# Altium PCB FC_Tracker_Ver_0_0.PcbDoc
Units mm, origin at the board's own origin, x right, y up, seen from the top; angles counter-clockwise.
Board outline 58 x 52 mm, 2 copper layers (Top Layer, Bottom Layer); 35 components, 24 nets, 153 pads, 30 vias.
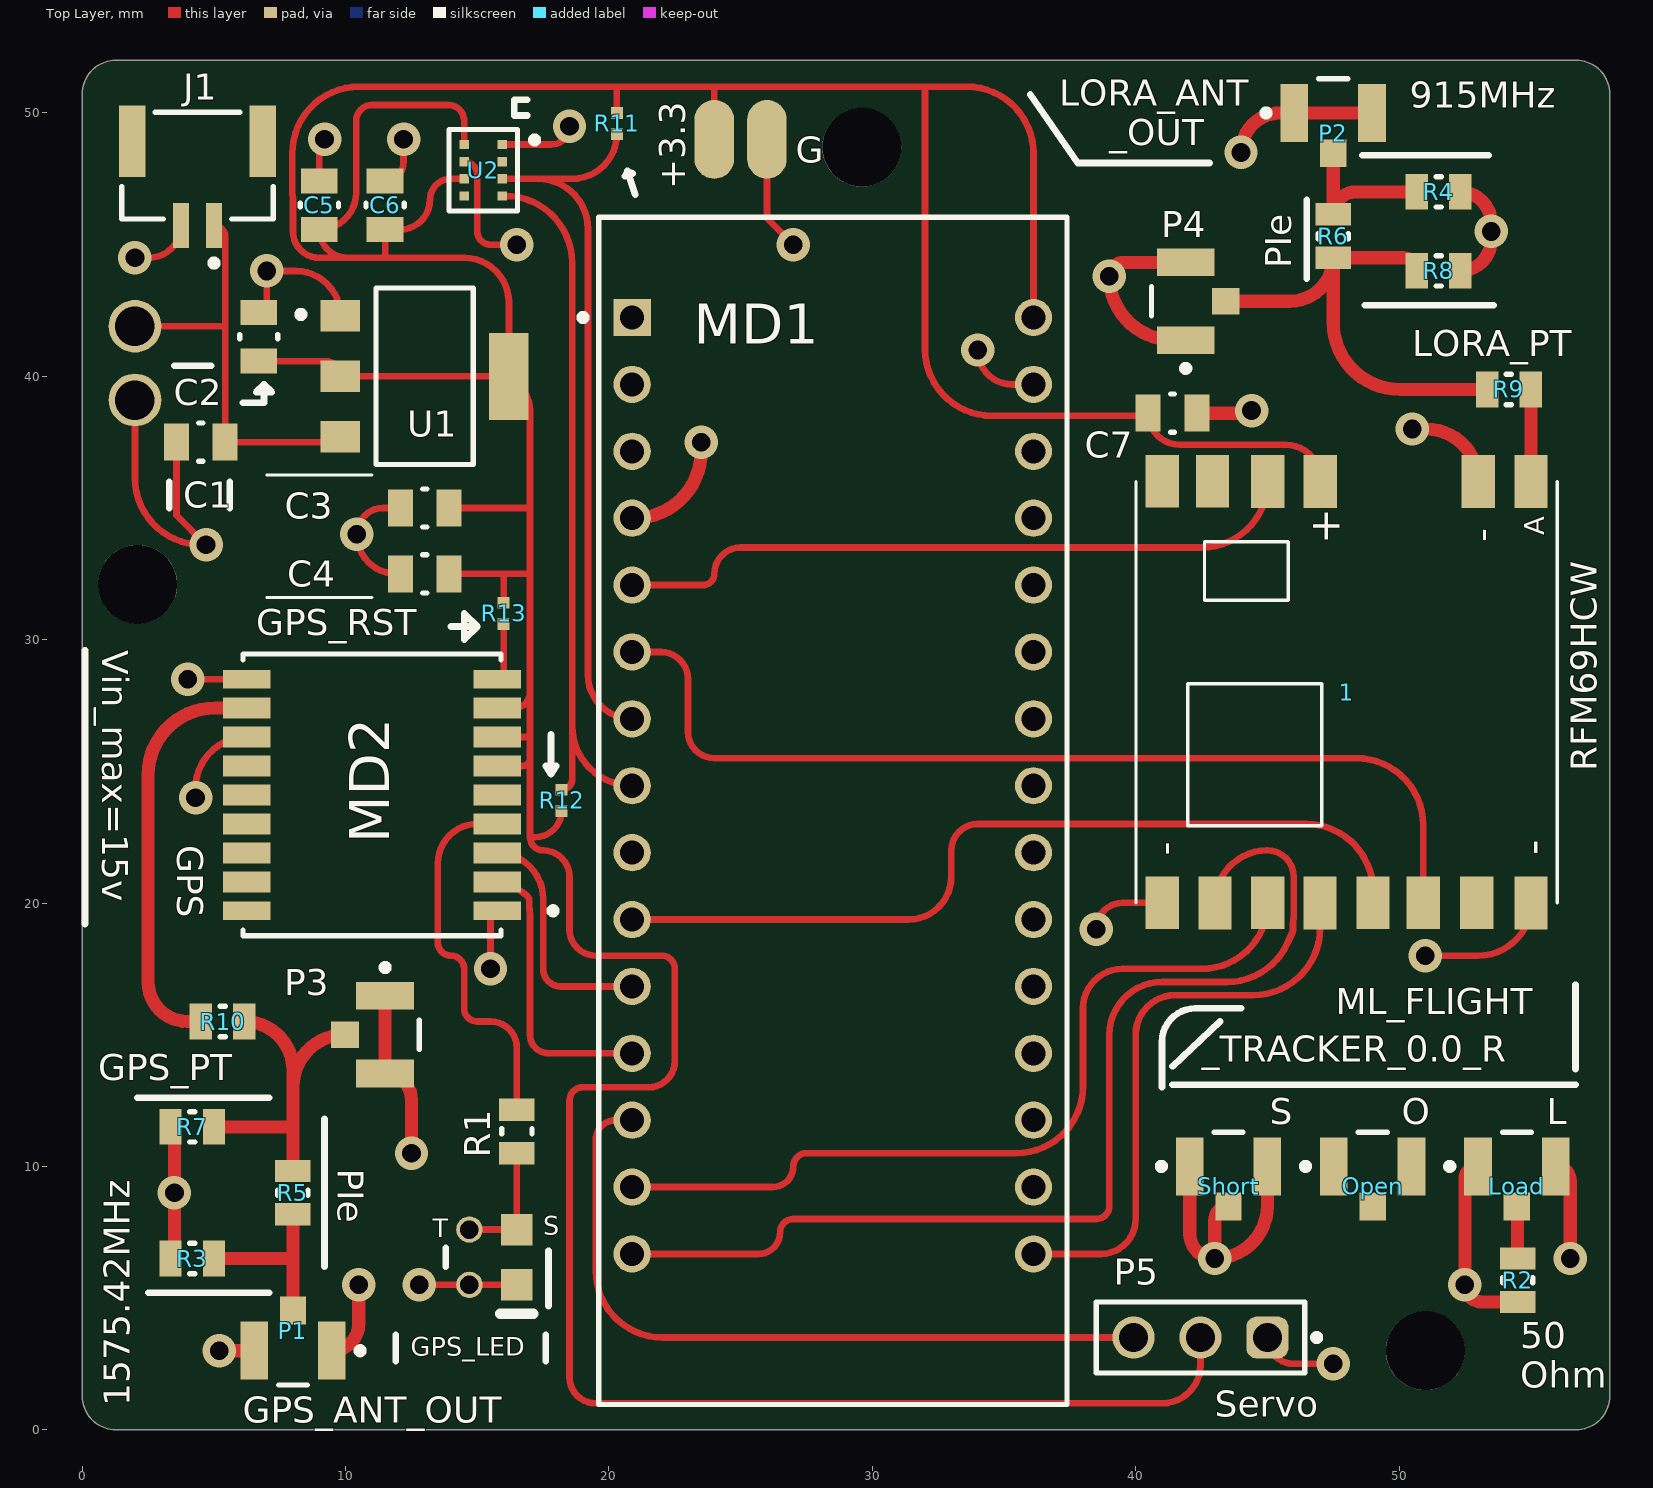
[diagram p0: Top Layer view]
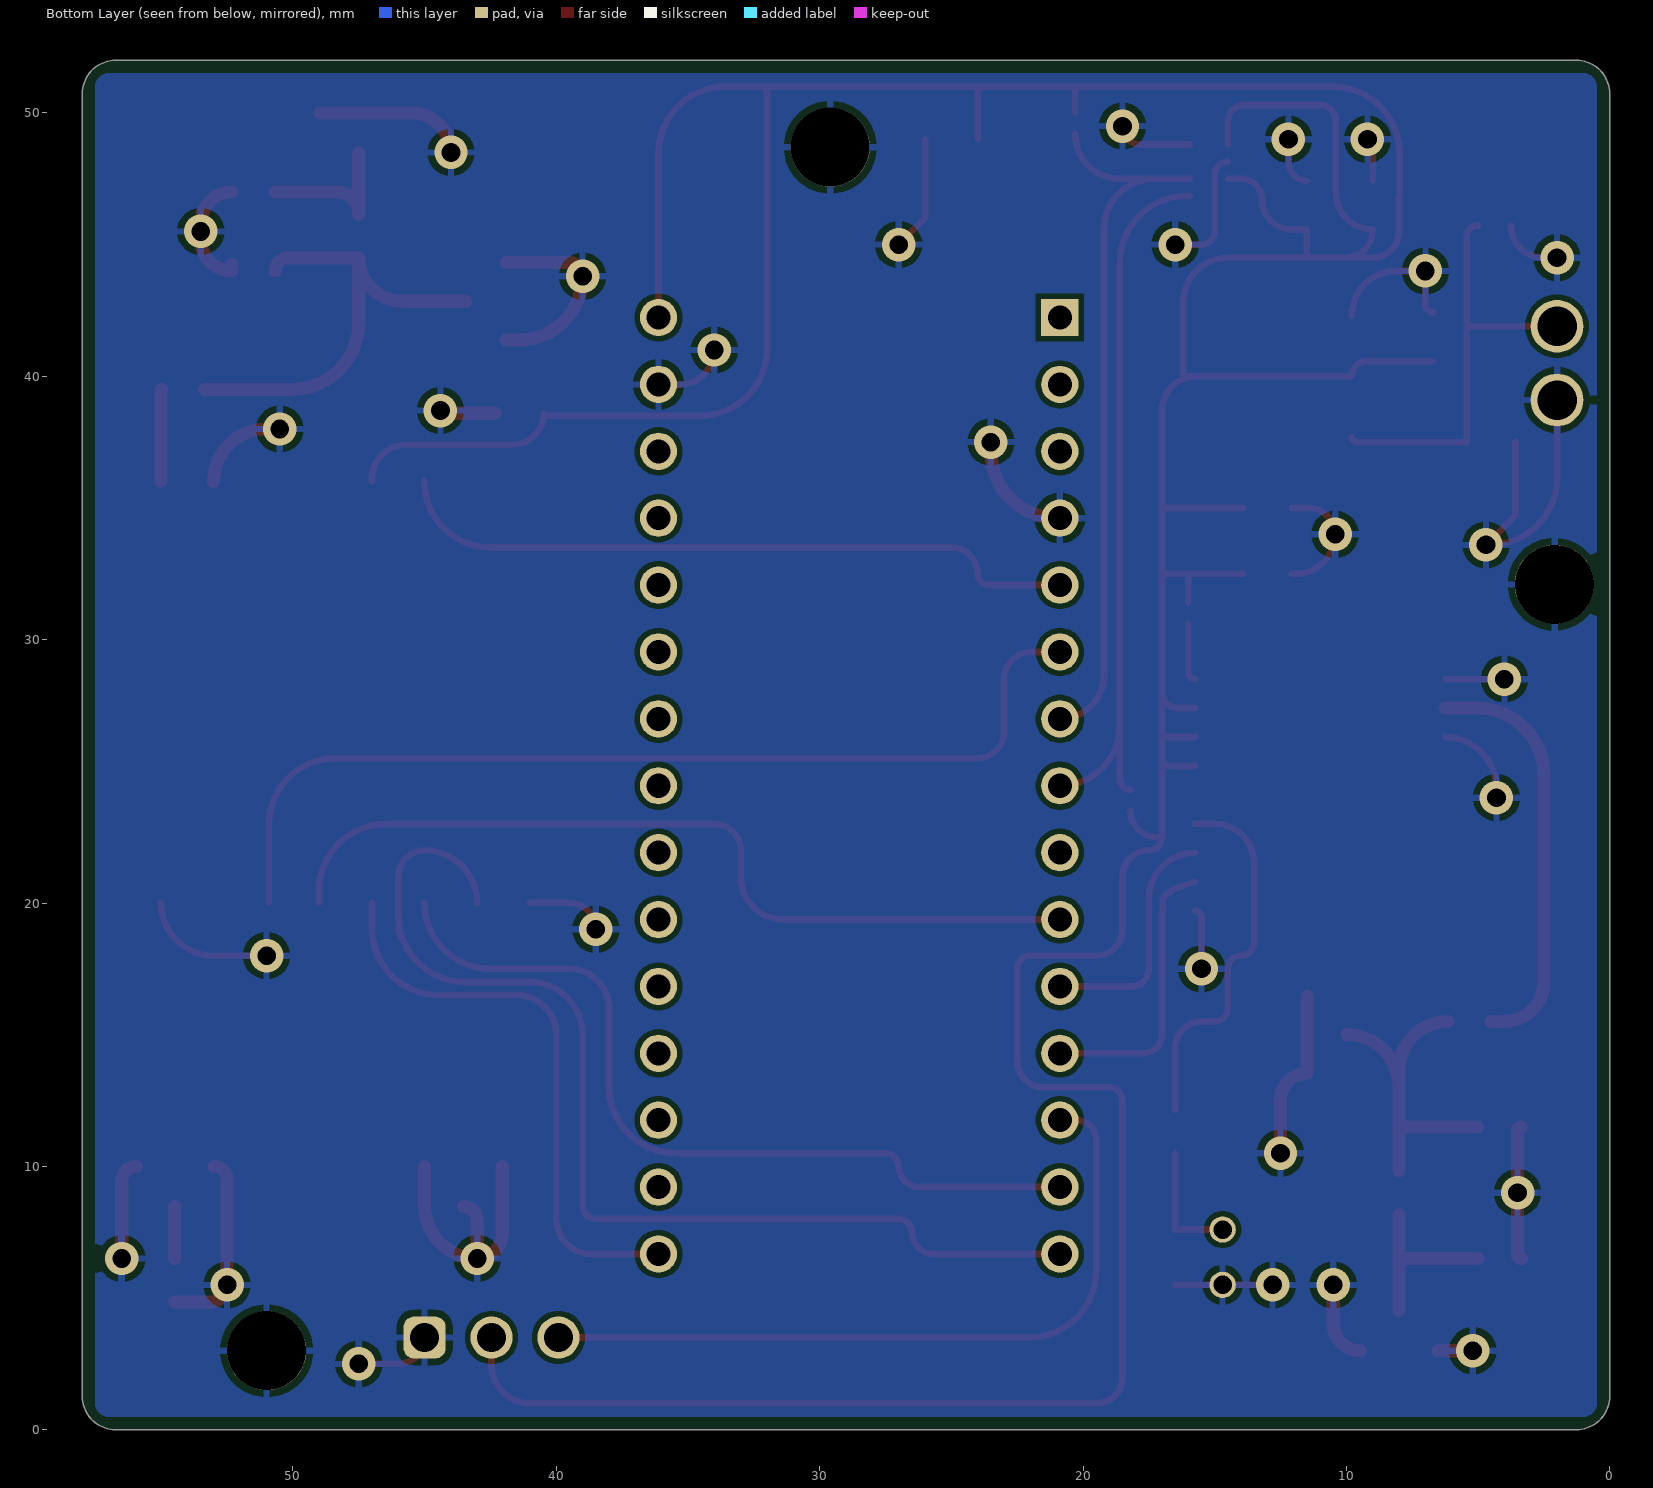
[diagram p1: Bottom Layer view, seen from below]

## Layer stack, top to bottom
Top Solder: solder mask 0.0102, Solder Resist, Dk 3.5
Top Layer: signal copper 0.0356
Dielectric 1: dielectric 0.32, FR-4, Dk 4.8
Bottom Layer: signal copper 0.0356
Bottom Solder: solder mask 0.0102, Solder Resist, Dk 3.5

## Board outline
0,1.27 0,50.73 cw(c1.27,50.73) 1.27,52 56.73,52 cw(c56.73,50.73) 58,50.73 58,1.27 cw(c56.73,1.27) 56.73,0 1.27,0 cw(c1.27,1.27)

## Design rules (kind name [scope] priority, off if disabled: settings)
Clearance [All] p1: gap=0.2 ignorepadtopadclearanceinfootprint=TRUE except(0.254: Arc-Hole Track-Hole SMDPad-Hole THPad-Hole Via-Hole Fill-Hole Poly-Hole Region-Hole Text-Hole)
ComponentClearance [All] p1: gap=0.2 collisioncheckmode=3 verticalgap=0.254 showdistances=FALSE
HoleSize [All] p1: absolutevalues=TRUE maxlimit=3.1 minlimit=0.025 maxpercent=80.000 minpercent=20.000
MinimumSolderMaskSliver [All] p1: minsoldermaskwidth=0.19
PolygonConnect [All] p1: connectstyle=Relief reliefconductorwidth=0.254 reliefentries=4 polygonreliefangle="90 Angle" airgapwidth=0.254
RoutingVias [All] p1: holewidth=0.711 width=1.27 viastyle="Through Hole" minholewidth=0.711 minwidth=1.27 maxholewidth=0.711 maxwidth=1.27
SilkToSolderMaskClearance [IsPad] p1: minsilkscreentomaskgap=0.1 clearancetoexposedcopper=TRUE
SolderMaskExpansion [All] p1: expansion=0.102 istentingtop=FALSE
SupplyNets "Schematic Supply Nets_3" [InNet('+12')] p1: voltage=0.000
SupplyNets "Schematic Supply Nets_2" [InNet('+3.3v')] p2: voltage=0.000
SupplyNets "Schematic Supply Nets_1" [InNet('GND')] p3: voltage=0.000
Width [All] p1: maxlimit=0.5 minlimit=0.254 preferedwidth=0.254
26 further rules are at their usual default settings.

## Components (designator, comment, footprint, x,y, rotation, side; value= is the part's Value field where it differs from the comment)
1 "_C2H_RFM95" _C2H_RFM95 48.012,30.23 r90 top
C1 "100 nF" FP-CC0805-0_85-MFG 4.5,37.5 r180 top
C2 "10 uF" FP-CC0805-0_85-MFG 6.7,41.5 r90 top value="100 nF"
C3 "0.1uF" FP-CC0805-0_85-MFG 13,35 r180 top value="100 nF"
C4 "0.1uF" FP-CC0805-0_85-MFG 13,32.5 r180 top value="100 nF"
C5 "100 nF" FP-CC0805-0_85-MFG 9,46.5 r90 top
C6 "100 nF" FP-CC0805-0_85-MFG 11.5,46.5 r90 top
C7 "100nF" FP-CC0805-0_85-MFG 41.4,38.6 r0 top value="100 nF"
GPS_LED "HSMG-C170" AVAG-HSMX-C170_V 16.5,6.55 r270 top (schematic designator DS1)
J1 "SM02B-GHS-TB(LF)(SN)" FP-SM02B-GHS-TB_LF_SN-MFG 4.374,48 r180 top
Load "U.FL-R-SMT-1(01)" HRS-U.FL-R-SMT-3_V 54.475,10 r0 top
MD1 "A000005" FP-A000005-MFG 28.5,23.5 r0 top
MD2 "MAX-M10S-00B" FP-MAX-M10S-00B-MFG 11,24.104 r180 top
Open "U.FL-R-SMT-1(01)" HRS-U.FL-R-SMT-3_V 49,10 r0 top
P1 "U.FL-R-SMT-1(01)" HRS-U.FL-R-SMT-3_V 8,3 r180 top
P2 "U.FL-R-SMT-1(01)" HRS-U.FL-R-SMT-3_V 47.5,50 r0 top
P3 "U.FL-R-SMT-1(01)" HRS-U.FL-R-SMT-3_V 11.5,15 r270 top
P4 "U.FL-R-SMT-1(01)" HRS-U.FL-R-SMT-3_V 41.9,42.85 r90 top
P5 "61300311121" 61300311121 42.46,3.5 r180 top
R1 "CRCW08050000Z0EA" RESC2013X50X30LL20T20 16.5,11.325 r270 top
R2 "CRCW08050000Z0EA" RESC2013X50X30LL20T20 54.5,5.675 r90 top
R3 "CRCW08050000Z0EA" RESC2013X50X30LL20T20 4.175,6.5 r0 top
R4 "CRCW08050000Z0EA" RESC2013X50X30LL20T20 51.5,47 r0 top
R5 "CRCW08050000Z0EA" RESC2013X50X30LL20T20 8,9 r270 top
R6 "CRCW08050000Z0EA" RESC2013X50X30LL20T20 47.5,45.325 r90 top
R7 "CRCW08050000Z0EA" RESC2013X50X30LL20T20 4.175,11.5 r180 top
R8 "CRCW08050000Z0EA" RESC2013X50X30LL20T20 51.5,44 r0 top
R9 "CRCW08050000Z0EA" RESC2013X50X30LL20T20 54.175,39.5 r180 top
R10 "CRCW08050000Z0EA" RESC2013X50X30LL20T20 5.325,15.5 r0 top
R11 "5K" RESC1005X40X25LL05T05 20.3,49.6 r90 top
R12 "5K" RESC1005X40X25LL05T05 18.2,23.9 r90 top
R13 "ERJ2GE0R00X" RESC1005X40X25LL05T05 16,31 r90 top
Short "U.FL-R-SMT-1(01)" HRS-U.FL-R-SMT-3_V 43.525,10 r0 top
U1 "LD1117S33CTR" FP-SOT-223-0046067_14-MFG 13,40 r0 top
U2 "DPS368XTSA1" FP-PG-VLGA-8-MFG 15.225,47.825 r0 top

## Footprints (in the part's own frame and the unit in brackets; to place one, negate y for a bottom-side part, rotate by r counter-clockwise, add the part's x,y. Pads: shape width x height; smd on the part's side, far side on the other; paste and mask are expansions set on the pad)
61300311121 [mm] "Pin Header, pitch 2.54 mm, THT, Vertical, single row, 3p"
  rrect50% 1.6x1.6 hole 1.1: 1(-2.54,0)
  round 1.6 hole 1.1: 2(0,0) 3(2.54,0)
  silkscreen extent -4.53,-1.35 3.96,1.35, body extent -3.81,-1.27 3.81,1.27, height 8.57
_C2H_RFM95 [mm]
  rect 2x1.27 smd: ANT(5.777,-7) DIO0(5.777,3) DIO1(5.78,5.095) DIO2(5.78,7) DIO5(-10.225,-4.936) GND(5.777,-5) GND1(-10.222,7) GND2(-10.23,-7) MISO(-10.23,5) MOSI(-10.225,3) NSS(-10.222,-1) RST(-10.222,-2.905) SCK(-10.23,1.012) VDD(5.777,1)
  silkscreen extent -10.23,-8 5.78,8
AVAG-HSMX-C170_V [mm] "SMD, 2-Leads, Body 2x1.25mm, Height 0.8mm"
  rect 1.2x1.2 smd: 1(-1.05,0) 2(1.05,0)
  silkscreen extent 2.15,-0.63 2.15,0.63, body extent -1,-0.63 1,0.63, height 0.8
FP-A000005-MFG [mil]
  rect 55.67x55.67 hole 35.98 paste-99999 mask+0: 1(-300,737.5)
  round 55.67 hole 35.98 paste-99999 mask+0: 2(-300,637.5) 3(-300,537.5) 4(-300,437.5) 5(-300,337.5) 6(-300,237.5) 7(-300,137.5) 8(-300,37.5) 9(-300,-62.5) 10(-300,-162.5) 11(-300,-262.5) 12(-300,-362.5) 13(-300,-462.5) 14(-300,-562.5) 15(-300,-662.5) 16(300,-662.5) 17(300,-562.5) 18(300,-462.5) 19(300,-362.5) 20(300,-262.5) 21(300,-162.5) 22(300,-62.5) 23(300,37.5) 24(300,137.5) 25(300,237.5) 26(300,337.5) 27(300,437.5) 28(300,537.5) 29(300,637.5) 30(300,737.5)
  silkscreen extent -379,-888 350,888, body extent -354,-891 354,891, height 10
FP-CC0805-0_85-MFG [mm]
  rect 0.95x1.4 smd paste+0 mask+0: 1(-0.925,0) 2(0.925,0)
  silkscreen extent -0.08,-0.72 0.08,0.72, body extent -1.6,-1.05 1.6,1.05, height 0.25
FP-MAX-M10S-00B-MFG [mm]
  rect 1.8x0.7 smd paste-1000 mask+0: 1(-4.75,4.4) 9(-4.75,-4.4) 10(4.75,-4.4) 18(4.75,4.4)
  rect 1.8x0.8 smd paste-1000 mask+0: 2(-4.75,3.3) 3(-4.75,2.2) 4(-4.75,1.1) 5(-4.75,0) 6(-4.75,-1.1) 7(-4.75,-2.2) 8(-4.75,-3.3) 11(4.75,-3.3) 12(4.75,-2.2) 13(4.75,-1.1) 14(4.75,0) 15(4.75,1.1) 16(4.75,2.2) 17(4.75,3.3)
  silkscreen extent -7,-5.35 4.9,5.35, body extent -5.75,-5.45 5.75,5.45, height 0.25
FP-PG-VLGA-8-MFG [mm]
  rect 0.35x0.35 smd paste-1000 mask+0: 1(0.725,0.975) 2(0.725,0.325) 3(0.725,-0.325) 4(0.725,-0.975) 5(-0.725,-0.975) 6(-0.725,-0.325) 7(-0.725,0.325) 8(-0.725,0.975)
  silkscreen extent -1.3,-1.55 2.08,1.55, body extent -1.55,-1.8 1.55,1.8, height 0.25
FP-SM02B-GHS-TB_LF_SN-MFG [mm]
  rect 0.6x1.7 smd paste+0 mask+0: 1(-0.625,2.275) 2(0.625,2.275)
  rect 1x2.7 smd paste+0 mask+0: 3(-2.475,-0.925) 4(2.475,-0.925)
  silkscreen extent -2.88,-2.02 2.88,3.82, body extent -3.08,-2.37 3.08,3.22, height 0.25
FP-SOT-223-0046067_14-MFG [mm]
  rect 1.5x1.2 smd paste+0 mask+0: 1(-3.2,2.3) 2(-3.2,0) 3(-3.2,-2.3)
  rect 1.5x3.3 smd paste+0 mask+0: 4(3.2,0)
  silkscreen extent -4.82,-3.35 1.85,3.35, body extent -4.05,-3.45 4.05,3.45, height 0.25
HRS-U.FL-R-SMT-3_V [mm] "SMT, 3-Leads, Body 2.6x2.6mm"
  rect 1.05x2.2 smd: 1(-1.475,0) 2(1.475,0)
  rect 1x1.05 smd: 3(0,-1.525)
  silkscreen extent -2.67,-0.12 0.55,1.3, body extent -1.3,-1.3 1.3,1.3, height 1.25
RESC1005X40X25LL05T05 [mm] "Chip Resistor, 2-Leads, Body 1.05x0.55mm, IPC High Density"
  rect 0.45x0.45 smd: 1(-0.4,0) 2(0.4,0)
  body extent -0.53,-0.28 0.53,0.28, height 0.4
RESC2013X50X30LL20T20 [mm] "Chip Resistor, 2-Leads, Body 2.00x1.25mm, IPC High Density"
  rect 0.85x1.35 smd: 1(-0.825,0) 2(0.825,0)
  silkscreen extent -0.1,-0.58 0.1,0.58, body extent -1.1,-0.72 1.1,0.72, height 0.5

## Part data
C1 C5 C6: library part CMP-2100-03606-3, Manufacturer=Yageo, Manufacturer Part Number=CC0805KRX7R9BB104, Package=CC0805-0.85, Temperature="-30°C to +85°C", Temperature Characteristic=X7R, Temperature Range High=+85°C, Temperature Range Low=-30°C, Tolerance=0.1, Voltage Rating="50 V", Automotive=No, Capacitance="100 nF", Category=Cap, ComponentLink2Description=Datasheet, ComponentLink2URL=http://www.yageo.com/documents/recent/UPY-GPHC_Y5V_6.3V-to-50V_8.pdf, Device Class L1="Passive Components", Device Class L2=Capacitors, Device Class L3="Ceramic Capacitors", Digikey Description="CAP CER 0.1UF 50V X7R 0805", Footprint Url=http://www.yageo.com/exep/pages/download/literatures/UPY-C_GEN_24.pdf, Height=0.95mm, Ipc Land Pattern Name=CAPC200125X85, Lead Free=Yes, Material=Ceramic, Mouser Description="Multilayer Ceramic Capacitors MLCC - SMD/SMT 100nF 50V X7R 10%", Octopart=https://octopart.com/cc0805krx7r9bb104-yageo-192993, RoHS=TRUE
C2: library part CMP-2100-03606-3, Capacitance="100 nF", Manufacturer=Yageo, Manufacturer Part Number=CC0805KRX7R9BB104, Package=CC0805-0.85, Temperature="-30°C to +85°C", Temperature Characteristic=X7R, Temperature Range High=+85°C, Temperature Range Low=-30°C, Tolerance=0.1, Voltage Rating="50 V", Automotive=No, Category=Cap, ComponentLink2Description=Datasheet, ComponentLink2URL=http://www.yageo.com/documents/recent/UPY-GPHC_Y5V_6.3V-to-50V_8.pdf, Device Class L1="Passive Components", Device Class L2=Capacitors, Device Class L3="Ceramic Capacitors", Digikey Description="CAP CER 0.1UF 50V X7R 0805", Footprint Url=http://www.yageo.com/exep/pages/download/literatures/UPY-C_GEN_24.pdf, Height=0.95mm, Ipc Land Pattern Name=CAPC200125X85, Lead Free=Yes, Material=Ceramic, Mouser Description="Multilayer Ceramic Capacitors MLCC - SMD/SMT 100nF 50V X7R 10%", Octopart=https://octopart.com/cc0805krx7r9bb104-yageo-192993, RoHS=TRUE
C3 C4 C7: library part CMP-2100-03606-3, "CAP CER 0.1UF 50V X7R 0805", Capacitance="100 nF", Manufacturer=Yageo, Manufacturer Part Number=CC0805KRX7R9BB104, Package=CC0805-0.85, Temperature="-30°C to +85°C", Temperature Characteristic=X7R, Temperature Range High=+85°C, Temperature Range Low=-30°C, Tolerance=0.1, Voltage Rating="50 V", Automotive=No, Category=Cap, ComponentLink2Description=Datasheet, ComponentLink2URL=http://www.yageo.com/documents/recent/UPY-GPHC_Y5V_6.3V-to-50V_8.pdf, Device Class L1="Passive Components", Device Class L2=Capacitors, Device Class L3="Ceramic Capacitors", Digikey Description="CAP CER 0.1UF 50V X7R 0805", Footprint Url=http://www.yageo.com/exep/pages/download/literatures/UPY-C_GEN_24.pdf, Height=0.95mm, Ipc Land Pattern Name=CAPC200125X85, Lead Free=Yes, Material=Ceramic, Mouser Description="Multilayer Ceramic Capacitors MLCC - SMD/SMT 100nF 50V X7R 10%", Octopart=https://octopart.com/cc0805krx7r9bb104-yageo-192993, RoHS=TRUE
GPS_LED: library part CMP-2000-05062-1, "Chip LED, Green, 2.2 V, -40 to 85 degC, 2-Pin SMD, Pb-Free, Tape and Reel", Forward Current If=20mA, Forward Voltage=2.2V, Forward Voltage VF Max=2.6V, LED Colour=Green, Manufacturer=Avago, Operating Temperature Max=85degC, Operating Temperature Min=-30degC, Operating Temperature Range=-30degCto+85degC, Opto Case Style=SMD, Package Description="2-Pin Surface Mount Device, Body 2 x 1.25 mm, Height 0.8 mm", Package Reference=HSMX-C170, Storage Temperature Min=-40degC, Bulb Size=1.25mmx1.4mm, Datasheet URL=https://datasheet.ciiva.com/29280/180495-da-01-en-chip-led-hsmg-c170-gelb-gruen-29280971.pdf, Datasheet Version=Oct-08, Dominant Wavelength=572nm, Dominant Wavelength Typ=572nm, External Depth=0.8mm, External Length / Height=2mm, External Width=1.25mm, Forward Current If Max=20mA, LED Mounting=SMD, LED Type=Standard, Lens Shape=Rectangular, Light Area Height=1mm, Luminous Intensity=15mcd, Luminous Intensity Min=4mcd, Luminous Intensity Typ=15mcd, Manufacturer URL=http://www.avagotech.com/, Mounting Type=SMD, MSL=MSL2A-4weeks, No. of Pins=2, Opto Mounting Orientation=Top, Packaging=CutTape, Peak Forward Current=20mA, Peak Wavelength=570nm, PIV Max=5V, Storage Temperature Max=85degC, SVHC=NoSVHC(16-Jun-2014), Viewing Angle=170deg, Voltage Vf Typ=2.2V, Wavelength Typ=570nm
J1: library part CMP-2000-07076-2, "CONN HEADER SMD R/A 2POS 1.25MM", Color=Natural, Current Rating=1A, Package Quantity=2500, Voltage Rating=50V, Connector Type="Outer Shroud Contact", Contact Material=Bronze, Contact Plating=Tin, Contact Type="Male Pin", Fastening Type=Latch, Housing Color=Natural, Housing Material=Nylon, Lead Free="Lead Free", Mount="Surface Mount", Number of Contacts=2, Number of Positions=2, Number of Rows=1, Orientation="Right Angle", Packaging="Tape and Reel", Pitch=0.049inch, Series=GH, Termination=Solder
Load Open P1 P2 P3 P4 Short: library part CMP-2000-05153-1, "Ultra Small Coaxial Connector, 6 GHz, -40 to 90 degC, 3-Pin SMD, RoHS, Bulk", Dielectric Material=LiquidCrystalPolymer(LCP), Frequency - Max=6GHz, Housing Color=Silver, Manufacturer="Hirose Electric", Operating Temperature=-40degC~90degC, Package Description="3-Pin Surface Mount Device, Body 2.6 x 2.6 mm", Package Reference=U.FL-R-SMT, Standard Package=100, Body Finish=Silver, Body Material=PhosphorBronze, Category=Connectors,Interconnects, Center Contact Material=PhosphorBronze, Center Contact Plating=Gold, Connector Style=U.FL, Connector Type=Jack,MalePin, Contact Termination=Solder, Datasheet URL=https://datasheet.ciiva.com/26945/getdatasheetpartid-475239-26945414.pdf, Datasheet Version=Feb-09, Dynamic Catalog=U.FLSeries, Family=CoaxialConnectors(RF), Fastening Type=Snap-On, Featured Product=HiroseU.FLSeries, Impedance=50Ohm, Manufacturer URL=https://www.hirose.com, Minimum Quantity=UltraMiniatureCoaxial, Mounting Type=SurfaceMount, Online Catalog=U.FLSeries, Other Names="H122041 / U.FL-R-SMT-1(01)-ND", Packaging=Bulk, Quantity Available=Bulk, Series=U.FL, Shield Termination=Solder, Unit PriceUSD=U.FL
MD1: library part CMP-189986-000002-1, "ARDUINO NANO ATMEGA328 EVAL BRD", Operating Supply Voltage=12V, Package Quantity=50, Core Architecture=AVR, Data Bus Width=8b, Evaluation Kit=Yes, Height=0.25inch, Interface=I2C, Length=7inch, Number of Bits=8, Packaging=Bulk, REACH SVHC="No SVHC", Series="AVR® ATmega", Weight=0.358383oz, Width=5inch
MD2: library part CMP-207130-000026-1, "GNSS LCC RX, ROM, TCXO, LNA, SAW"
P5: library part CMP-1502-01062-3, Color=Black, Contact Resistance=20mΩ, Current Rating=3A, Max Operating Temperature=105°C, Min Operating Temperature=-40°C, Operating Supply Voltage=250V, Connector Type="Male Pin", Contact Material=Copper, Contact Mating Length=5.9944mm, Contact Plating=Gold, Gender=Male, Height=8.94mm, Lead Free="Lead Free", Lead Pitch=2.54mm, Mount="Through Hole", NexarPartId=32855521, Number of Contacts=3, Number of Pins=3, Number of Positions=3, Number of Rows=1, Orientation=Vertical, Packaging=Bulk, Pitch=2.54mm, REACH SVHC=Unknown, RoHS=Compliant, Termination=Solder, Voltage Rating=250V
R1 R3 R4 R5 R6 R7 R8 R9 R10: library part CMP-2001-04896-1, Manufacturer="Vishay Dale", Part Number=CRCW08050000Z0EA
R2: library part CMP-2001-04896-1, "50 Ohm", Manufacturer="Vishay Dale", Part Number=CRCW08050000Z0EA
R11: library part CMP-2000-07451-1, "5KOhm", Case Code (Imperial)=0402, Case Code (Metric)=1005, Manufacturer=Panasonic, Max Operating Temperature=155degC, Max Power Dissipation=100mW, Min Operating Temperature=-55degC, Package Description="2-Pin Surface Mount Device, Body 1 x 0.5 mm", Package Quantity=1, Package Reference=402, Resistance=0mOhm, Temperature Coefficient=600ppm/��C, Tolerance=5%, Voltage Rating=50V, Case/Package=0402, Composition=ThickFilm, Contact Plating=Tin, Datasheet URL=https://industrial.panasonic.com/cdbs/www-data/pdf/RDA0000/AOA0000C301.pdf, Datasheet Version=03/2015, Depth=0.5mm, Height=0.35mm, Lead Free=LeadFree, Length=1mm, Manufacturer URL=http://www.panasonic.com/, Military Standard=Not, Mount=SurfaceMount, Mounting Technology=SurfaceMount, Number of Terminations=2, Packaging=TapeandReel, Power Rating=100mW, Radiation Hardening=No, REACH SVHC=NoSVHC, RoHSCompliant=True, Termination=SMD/SMT, Voltage Rating (DC)=50V, Width=0.02inch
R12: library part CMP-2000-07451-1, "5 KOhm", Case Code (Imperial)=0402, Case Code (Metric)=1005, Manufacturer=Panasonic, Max Operating Temperature=155degC, Max Power Dissipation=100mW, Min Operating Temperature=-55degC, Package Description="2-Pin Surface Mount Device, Body 1 x 0.5 mm", Package Quantity=1, Package Reference=402, Resistance=0mOhm, Temperature Coefficient=600ppm/��C, Tolerance=5%, Voltage Rating=50V, Case/Package=0402, Composition=ThickFilm, Contact Plating=Tin, Datasheet URL=https://industrial.panasonic.com/cdbs/www-data/pdf/RDA0000/AOA0000C301.pdf, Datasheet Version=03/2015, Depth=0.5mm, Height=0.35mm, Lead Free=LeadFree, Length=1mm, Manufacturer URL=http://www.panasonic.com/, Military Standard=Not, Mount=SurfaceMount, Mounting Technology=SurfaceMount, Number of Terminations=2, Packaging=TapeandReel, Power Rating=100mW, Radiation Hardening=No, REACH SVHC=NoSVHC, RoHSCompliant=True, Termination=SMD/SMT, Voltage Rating (DC)=50V, Width=0.02inch
R13: library part CMP-2000-07451-1, "Chip Resistor, 0 Ohm, 0.1 W, -55 to 155 degC, 0402 (1005 Metric), RoHS, Tape and Reel", Case Code (Imperial)=0402, Case Code (Metric)=1005, Manufacturer=Panasonic, Max Operating Temperature=155degC, Max Power Dissipation=100mW, Min Operating Temperature=-55degC, Package Description="2-Pin Surface Mount Device, Body 1 x 0.5 mm", Package Quantity=1, Package Reference=402, Resistance=0mOhm, Temperature Coefficient=600ppm/��C, Tolerance=5%, Voltage Rating=50V, Case/Package=0402, Composition=ThickFilm, Contact Plating=Tin, Datasheet URL=https://industrial.panasonic.com/cdbs/www-data/pdf/RDA0000/AOA0000C301.pdf, Datasheet Version=03/2015, Depth=0.5mm, Height=0.35mm, Lead Free=LeadFree, Length=1mm, Manufacturer URL=http://www.panasonic.com/, Military Standard=Not, Mount=SurfaceMount, Mounting Technology=SurfaceMount, Number of Terminations=2, Packaging=TapeandReel, Power Rating=100mW, Radiation Hardening=No, REACH SVHC=NoSVHC, RoHSCompliant=True, Termination=SMD/SMT, Voltage Rating (DC)=50V, Width=0.02inch
U1: library part CMP-0244-00307-2, "IC REG LINEAR 3.3V 800MA SOT223", Case/Package=SOT-223, Dropout Voltage=1.1V, Input Bias Current=5mA, Max Input Voltage=15V, Max Operating Temperature=125°C, Max Output Current=1.3A, Max Output Voltage=3.3V, Max Power Dissipation=12W, Min Input Voltage=5.3V, Min Operating Temperature=-40°C, Output Current=950mA, Output Voltage Accuracy=1%, Package Quantity=1, Quiescent Current=10mA, Accuracy=1%, Contact Plating=Tin, Height=1.8mm, Lead Free="Lead Free", Length=6.5mm, Max Supply Voltage=15V, Min Output Voltage=3.3V, Min Supply Voltage=3.3V, Mount="Surface Mount", Nominal Output Voltage=3.3V, Number of Outputs=1, Number of Pins=4, Number of Regulators=1, Number of Terminals=4, Output Type=Fixed, Output Voltage=3.3V, Packaging="Tape and Reel", Polarity=Positive, Power Dissipation=12W, Radiation Hardening=No, REACH SVHC="No SVHC", Termination=SMD/SMT, Weight=0.01lb, Width=3.5mm
U2: library part CMP-32885-000001-1, "DIGITAL PRESSURE SENSOR", Ambient Temperature Range High=+85°C, Ambient Temperature Range Low=-40°C, Manufacturer=Infineon, Max Supply Voltage=3.6V, Min Supply Voltage=1.2V, Operating Supply Current=345uA, Package=PG-VLGA-8, Temperature="-40°C to +85°C", Automotive=No, Category=IC, ComponentLink2Description=Datasheet, ComponentLink2URL=https://www.infineon.com/dgdl/Infineon-DPS368-DataSheet-v01_01-EN.pdf?fileId=5546d46269e1c019016a0c45105d4b40, Device Class L1=Sensors, Device Class L2="Pressure Sensors", Device Class L3=unset, Digikey Description="DIGITAL PRESSURE SENSOR", Footprint Url=https://www.infineon.com/cms/en/product/packages/PG-VLGA/PG-VLGA-8-2/, Height=1.1mm, Lead Free=Yes, Manufacturer Part Number=DPS368XTSA1, Octopart=https://octopart.com/dps368xtsa1-infineon-98278029, Port Style="No Port", RoHS=TRUE, Sensor Output=I2C,SPI, Temperature Range High=+85°C, Temperature Range Low=-40°C
1: DeviceSetName=_C2H_RFM95, GateName_1=G$1, LibraryName=AmbaSat-1v1-01-NO-solar, Package=_C2H_RFM95, SymbolName_1=_C2H_RFM95

## Free pads (board coordinates)
  round 3 hole 3: 2(51,3) 4(29.6,48.7) 5(2.1,32.1)
  oval 1.5x3 smd: 7(24,49) 8(26,49)
  round 2 hole 1.5: 9(2,41.9) 10(2,39.1)
  round 1 hole 0.7: 11(14.7,7.6) 12(14.7,5.5)

## Via types
v1: diameter 1.27, hole 0.711, Top Layer to Bottom Layer, 30 vias

## Nets (pads, with @x,y where several pads share a name; then routed paths per layer and width w, separated by ;. In a path a pad name is that pad's centre, name@x,y a point inside that pad or via, vN(x,y) a via of type N, cw(c..) or ccw(c..) an arc to the next point about the centre after c; other vN are vias at no path point)
+3.3v: 1.VDD C2.1 C3.1 C4.1 C5.1 C6.1 C7.1 MD1.30 MD2.6 MD2.7 MD2.8 P5.2 pad.7 R11.2 R12.1 R13.2 U1.2 U1.4 U2.6 U2.8 | length 197.2
  Top Layer w0.254: C2.1 9.225,40.575 cw(c9.225,40) U1.2 U1.4@15.7,40 ; C4.1 16,32.5 ; C3.1 17,35 ; U2.6 14,47.5 ccw(c14,46.7) 13.2,46.7 cw(c12.075,46.7) 12.075,45.575 C6.1 11.5,44.5 ; U2.8 14.5,49.7 ccw(c13.9,49.7) 13.9,50.3 11,50.3 ccw(c11,49.7) 10.4,49.7 10.4,46.975 cw(c9,46.975) C5.1 ccw(c10.075,45.575) 10.075,44.5 ; MD2.6 16.704,25.204 ccw(c16.704,25.5) 17,25.5 ; MD2.7 16.804,26.304 ccw(c16.804,26.5) 17,26.5 ; MD2.8 16.404,27.404 ccw(c16.404,28) 17,28 ; R13.2 16,32.5 ; R12.1 cw(c17.2,23.5) 17.2,22.5 17,22.5 ; R11.2 20.3,51 ; pad.7 24,51 ; MD1.30 36.12,48.46 ccw(c33.58,48.46) 33.58,51 32,51 ; P5.2 42.46,2.46 cw(c41,2.46) 41,1 19.5,1 cw(c19.5,2) 18.5,2 18.5,12.5 cw(c19,12.5) 19,13 21.5,13 ccw(c21.5,14) 22.5,14 22.5,17.5 ccw(c22,17.5) 22,18 19.5,18 cw(c19.5,19) 18.5,19 18.5,21 ccw(c17.5,21) 17.5,22 cw(c17.5,22.5) 17,22.5 ; 1.VDD 47.012,36.088 ccw(c45.7,36.088) 45.7,37.4 41.675,37.4 cw(c41.675,38.6) C7.1 40.375,38.5 34.54,38.5 cw(c34.54,41.04) 32,41.04 32,51 ; 10.075,44.5 9,44.5 cw(c9,45.5) 8,45.5 8,46.775 ccw(c7.746,46.775) 7.988,46.852 cw(c8.3,46.95) 7.973,46.95 7.973,48.46 cw(c10.513,48.46) 10.513,51 20.3,51 ; 10.075,44.5 11.5,44.5 ; 11.5,44.5 14.5,44.5 cw(c14.5,42.8) 16.2,42.8 U1.4 U1.4@15.7,40 ; U1.4@15.7,40 cw(c15.7,38.7) 17,38.7 17,35 ; 16,32.5 17,32.5 ; 17,22.5 17,25.5 ; 17,25.5 17,26.5 ; 17,26.5 17,28 ; 17,28 17,32.5 ; 17,32.5 17,35 ; 20.3,51 24,51 ; 24,51 32,51
+12: C1.1 J1.1 pad.9 U1.3 | length 16.4
  Top Layer w0.254: pad.9 5.425,41.9 ; J1.1 cw(c4.999,45.299) 5.425,45.299 5.425,41.9 ; U1.3 cw(c9.6,37.7) 9.6,37.5 C1.1 5.425,41.9
ALT_SCK: MD1.8 R12.2 U2.4 | length 27.9
  Top Layer w0.254: U2.4 16.06,46.85 cw(c16.06,44.31) 18.6,44.31 18.6,26.733 ; R12.2 ccw(c18.2,24.7) 18.6,24.7 18.6,26.733 ; MD1.8 cw(c20.88,26.733) 18.6,26.733
ALT_SDA: MD1.7 R11.1 U2.3 | length 27.9
  Top Layer w0.254: U2.3 17.3,47.5 ; R11.1 cw(c18.6,49.2) 18.6,47.5 17.3,47.5 ; MD1.7 cw(c20.88,28.673) 19.2,28.673 19.2,45.6 ccw(c17.3,45.6) 17.3,47.5
CS: 1.NSS MD1.10 | length 32.5
  Top Layer w0.254: MD1.10 31.373,19.373 ccw(c31.373,21) 33,21 33,22 cw(c34,22) 34,23 46.472,23 cw(c46.472,20.46) 49.012,20.46 1.NSS
DIO0: 1.DIO0 MD1.5 | length 26.4
  Top Layer w0.254: MD1.5 23.573,32.073 ccw(c23.573,32.5) 24,32.5 cw(c25,32.5) 25,33.5 42.505,33.5 ccw(c42.505,36.008) 1.DIO0
GND: 1.GND 1.GND1 1.GND2 C1.2 C2.2 C3.2 C4.2 C5.2 C6.2 C7.2 GPS_LED.2 J1.2 Load.1 Load.2 MD1.4 MD1.29 MD2.1 MD2.10 MD2.12 P1.1 P1.2 P2.1 P2.2 P3.1 P3.2 P4.1 P4.2 P5.1 pad.2 pad.4 pad.5 pad.8 pad.10 pad.12 R2.1 R3.1 R4.2 R7.2 R8.2 Short.1 Short.2 Short.3 U1.1 U2.1 U2.7 | length 132
  Top Layer w0.254: pad.10 2,36.14 ccw(c4.54,36.14) 4.54,33.6 v1(4.7,33.6) 3.575,34.725 C1.2 ; v1(2,44.5) 2.524,44.5 ccw(c2.524,45.725) J1.2 ; v1(4,28.5) 6.25,28.5 MD2.10 ; v1(4.3,24) 4.3,24.354 cw(c6.25,24.354) MD2.12 ; C2.2 ccw(c6.7,42.725) 7,42.725 v1(7,44) 8.1,44 cw(c8.1,42.3) U1.1 ; C5.2 9,48.8 cw(c9.2,48.8) v1(9.2,49) ; C6.2 ccw(c11.5,48.125) 12.2,48.125 v1(12.2,49) ; C4.2 11.925,32.5 cw(c11.925,34) v1(10.425,34) cw(c11.425,34) 11.425,35 C3.2 ; v1(12.8,5.5) pad.12 GPS_LED.2 ; U2.7 14.548,48.148 cw(c14.5,47.65) 14.97,47.821 14.982,47.787 cw(c14.675,47.675) 15.002,47.675 15.002,46.675 cw(c14.675,46.675) 15.001,46.647 ccw(c15.254,46.627) 15,46.628 15,45.5 ccw(c15.5,45.5) 15.5,45 v1(16.5,45) ; v1(15.5,17.5) 15.5,19.454 cw(c15.75,19.454) MD2.1 ; U2.1 17.8,48.8 ccw(c17.8,49.5) v1(18.5,49.5) ; pad.8 26,46 v1(27,45) ; v1(34,41) ccw(c35.308,41) 35.308,39.693 MD1.29 ; v1(38.5,19) cw(c39.508,19) 39.508,20.008 1.GND1 ; P5.1 ccw(c46,3.5) 46,2.5 v1(47.5,2.5) ; v1(51,18) 53.012,18 ccw(c53.012,20) 1.GND2
  Top Layer w0.5: R3.1 ccw(c3.35,6.65) 3.5,6.65 v1(3.5,9) 3.5,11.35 ccw(c3.35,11.35) R7.2 ; v1(5.2,3) P1.2 ; P1.1 ccw(c9.475,4.025) 10.5,4.025 v1(10.5,5.5) ; P3.1 P3.2 cw(c11.5,12.525) 12.5,12.525 v1(12.5,10.5) ; MD1.4 20.96,34.613 ccw(c20.96,37.153) 23.5,37.153 v1(23.5,37.5) ; P4.1 41.425,41.375 cw(c41.425,43.8) v1(39,43.8) cw(c39.525,43.8) 39.525,44.325 P4.2 ; Short.1 42.05,7.45 ccw(c43,7.45) v1(43,6.5) ; C7.2 44.3,38.6 ccw(c44.3,38.7) v1(44.4,38.7) ; Short.3 ccw(c43.525,7.95) 43,7.95 v1(43,6.5) ; v1(44,48.5) cw(c45.5,48.5) 45.5,50 P2.1 P2.2 ; Short.2 45,8.5 cw(c43,8.5) v1(43,6.5) ; v1(50.5,38) 51.02,38 cw(c51.02,36.008) 1.GND ; R8.2@52.325,44.25 R8.2 ccw(c52.325,45.175) 53.5,45.175 v1(53.5,45.5) 53.5,45.825 ccw(c52.325,45.825) R4.2 ; Load.1 ccw(c53,9.5) 52.5,9.5 v1(52.5,5.5) ccw(c53.15,5.5) 53.15,4.85 R2.1 ; Load.2 cw(c55.95,9.45) 56.5,9.45 v1(56.5,6.5)
GPS_ANT: MD2.11 R10.1 | length 15.9
  Top Layer w0.5: R10.1 4,15.5 cw(c4,17) 2.5,17 2.5,24.864 cw(c5.04,24.864) 5.04,27.404 MD2.11
GPS_RX: MD1.11 MD2.3 | length 9.2
  Top Layer w0.254: MD2.3 cw(c15.75,20.154) 17.5,20.154 17.5,17.5 ccw(c18.167,17.5) 18.167,16.833 MD1.11
GPS_TX: MD1.12 MD2.2 | length 10.9
  Top Layer w0.254: MD2.2 16.523,20.537 16.834,20.324 cw(c16.65,20.054) 16.977,20.054 16.977,19.815 ccw(c17.231,19.816) 16.978,19.792 16.999,19.579 cw(c16.746,19.554) 17,19.554 17,15 ccw(c17.708,15) 17.708,14.293 MD1.12
LoRa_ANT: 1.ANT R9.1 | length 3.5
  Top Layer w0.5: R9.1 55.012,39.5 1.ANT
MISO: 1.MISO MD1.15 | length 41.4
  Top Layer w0.254: MD1.15 25.673,6.673 ccw(c25.673,7.5) 26.5,7.5 cw(c27,7.5) 27,8 38.5,8 ccw(c38.5,8.5) 39,8.5 39,15 cw(c41,15) 41,17 43.46,17 ccw(c43.46,19.54) 45.774,18.493 45.945,18.871 ccw(c45.647,19.006) 45.974,19.006 45.974,19.162 cw(c46.228,19.161) 45.975,19.179 45.999,19.522 ccw(c45.746,19.54) 46,19.54 46,21 ccw(c45,21) 45,22 ccw(c45,20.012) 43.012,20.012 1.MISO
MOSI: 1.MOSI MD1.14 | length 31.6
  Top Layer w0.254: MD1.14 26.213,9.213 ccw(c26.213,10) 27,10 cw(c27.5,10) 27.5,10.5 35.46,10.5 ccw(c35.46,13.04) 38,13.04 38,16 cw(c39.5,16) 39.5,17.5 42.507,17.5 ccw(c42.507,20.006) 1.MOSI
NetGPS_LED_1: GPS_LED.1 pad.11 R1.2 | length 4.7
  Top Layer w0.254: pad.11 GPS_LED.1 R1.2
NetLoad_3: Load.3 R2.2 | length 2
  Top Layer w0.5: Load.3 cw(c54.475,8.45) 54.5,8.45 R2.2
NetMD2_4: MD2.4 R1.1 | length 14.4
  Top Layer w0.254: MD2.4 15.004,23.004 ccw(c15.004,21.5) 13.5,21.5 13.5,18.5 ccw(c14,18.5) 14,18 cw(c14,17.5) 14.5,17.5 14.5,16 ccw(c15,16) 15,15.5 15.5,15.5 cw(c15.5,14.5) 16.5,14.5 R1.1
NetMD2_9: MD2.9 R13.1 | length 2.2
  Top Layer w0.254: MD2.9 ccw(c15.75,28.754) 16,28.754 R13.1
NetP1_3: P1.3 R3.2 R5.2 | length 6.7
  Top Layer w0.5: R3.2 8,6.5 ; P1.3 8,6.5 ; R5.2 8,6.5
NetP2_3: P2.3 R4.1 R6.2 | length 6
  Top Layer w0.5: P2.3 R6.2 cw(c48.35,46.15) 48.35,47 R4.1
NetP3_3: P3.3 R5.1 R7.1 R10.2 | length 12.9
  Top Layer w0.5: R7.1 7.925,11.5 cw(c7.925,11.425) 8,11.425 ; R10.2 cw(c6.15,13.65) 8,13.65 8,13.025 ; R5.1 8,11.425 ; P3.3 ccw(c9.975,13.025) 8,13.025 ; 8,11.425 8,13.025
NetP4_3: P4.3 R6.1 R8.1 R9.2 | length 18.2
  Top Layer w0.5: P4.3 45.85,42.85 ccw(c45.85,44.5) R6.1 ; R8.1 ccw(c50.175,44) 50.175,44.5 R6.1 ; R9.2 50.04,39.5 cw(c50.04,42.04) 47.5,42.04 R6.1
PWM1: MD1.13 P5.3 | length 28.6
  Top Layer w0.254: MD1.13 20.253,11.753 ccw(c20.253,11) 19.5,11 19.5,6.04 ccw(c22.04,6.04) 22.04,3.5 P5.3
RST: 1.RST MD1.6 | length 37.6
  Top Layer w0.254: MD1.6 21.967,29.533 cw(c21.967,28.5) 23,28.5 23,26.5 ccw(c24,26.5) 24,25.5 48.377,25.5 cw(c48.377,22.96) 50.917,22.96 1.RST
SCK: 1.SCK MD1.16 | length 21.9
  Top Layer w0.254: MD1.16 38.673,6.673 ccw(c38.673,8) 40,8 40,15 cw(c41.5,15) 41.5,16.5 44.46,16.5 ccw(c44.46,19.04) 47,19.04 1.SCK
pads on no net: 1.DIO1 1.DIO2 1.DIO5 J1.3 J1.4 MD1.1 MD1.2 MD1.3 MD1.9 MD1.17 MD1.18 MD1.19 MD1.20 MD1.21 MD1.22 MD1.23 MD1.24 MD1.25 MD1.26 MD1.27 MD1.28 MD2.5 MD2.13 MD2.14 MD2.15 MD2.16 MD2.17 MD2.18 Open.1 Open.2 Open.3 U2.2 U2.5

## Polygon pours and split planes (outlines as drawn)
GND on Bottom Layer "GND_L02_P000" (solid, pour order 0): 0.5,51 cw(c1,51) 1,51.5 57,51.5 cw(c57,51) 57.5,51 57.5,1 cw(c57,1) 57,0.5 1,0.5 cw(c1,1) 0.5,1

## Silkscreen, mask and mechanical layers (free items; w line width, h text height)
Top Overlay:
  lines w0.1: 7,31.6 11,31.6 ; 7,36.25 11,36.25
  lines w0.254: 0.1,19.2 0.1,29.6 ; 2.1,12.6 7.1,12.6 ; 2.5,5.2 7.1,5.2 ; 3.3,35 3.3,36 ; 3.5,40.4 4.9,40.4 ; 5.6,35 5.6,36 ; 6.1,39 6.9,39 6.9,39.7 ; 9.2,6.2 9.2,11.8 ; 11.9,2.6 11.9,3.6 ; 13.8,6.2 13.8,6.9 ; 14,30.5 15,30.5 ; 16.9,49.9 16.4,49.9 16.4,50.5 16.9,50.5 ; 17.6,2.6 17.6,3.6 ; 17.7,4.7 17.7,6.8 ; 17.8,26.4 17.8,24.9 ; 21,46.9 20.7,47.8 ; 36,50.7 37.8,48.1 42.8,48.1 ; 41,13 41,14.73 cw(c42.27,14.73) 42.27,16 44,16 ; 41.4,13.1 43.4,13.1 56.7,13.1 ; 41.4,13.8 43.2,15.5 ; 46.5,43.7 46.5,46.7 ; 48.6,48.4 53.4,48.4 ; 48.7,42.7 53.6,42.7 ; 56.7,13.7 56.7,16.9 ; 6.9,39.7 7.2,39.4 6.6,39.4 6.9,39.7 ; 15,30.5 14.5,30 14.5,31 15,30.5 ; 17.8,24.9 17.6,25.2 18,25.2 17.8,24.9 ; 20.7,47.8 20.9,47.7 20.6,47.6 20.7,47.8
  text "LORA_ANT" at 37.1,50.267 h1
  text "915MHz" at 50.4,50.2 h1
  text "_OUT" at 39,48.767 h1
  text "G" at 27.1,48.1 h1
  text "+3.3" at 22.9,47.1 h1 r90
  text "PIe" at 45.9,44.1 h1 r90
  text "LORA_PT" at 50.5,40.767 h1
  text "GPS_RST" at 6.6,30.167 h1
  text "Vin_max=15v" at 0.767,29.6 h1 r270
  text "RFM69HCW" at 57.5,25 h1 r90
  text "GPS" at 3.6,22.2 h1 r270
  text "ML_FLIGHT" at 47.6,15.767 h1
  text "_TRACKER_0.0_R" at 42.5,13.967 h1
  text "GPS_PT" at 0.6,13.267 h1
  text "S" at 45.1,11.6 h1
  text "O" at 50.1,11.6 h1
  text "L" at 55.6,11.6 h1
  text "PIe" at 9.7,9.9 h1 r270
  text "S" at 17.5,7.4 h0.7
  text "T" at 13.3,7.3 h0.7
  text "50" at 54.6,3.1 h1
  text "Ohm" at 54.6,1.6 h1
  text "1575.42MHz" at 1.8,0.9 h1 r90
  text "Servo" at 43,0.5 h1
  text "GPS_ANT_OUT" at 6.1,0.267 h1

## Text inside footprints (layer, text, board x,y; h text height)
1: Top Overlay "-" at 41.611,21.797 h1.08 r90; Top Overlay "-" at 55.645,21.81 h1.19 r90; Top Overlay "-" at 53.651,33.695 h1.08 r90; Top Overlay "A" at 55.515,33.962 h0.76 r90; Top Overlay "+" at 47.746,33.632 h1.19 r90